# Altium PCB RF-UNIT-SPLIT.PcbDoc (part 2 of 2)
Units mm, origin at the board's own origin, x right, y up, seen from the top; angles counter-clockwise.
Board outline 99.88 x 99.9 mm, 2 copper layers (Top Layer, Bottom Layer), stack 1.671 mm thick; 85 components, 98 nets, 425 pads, 1878 vias.
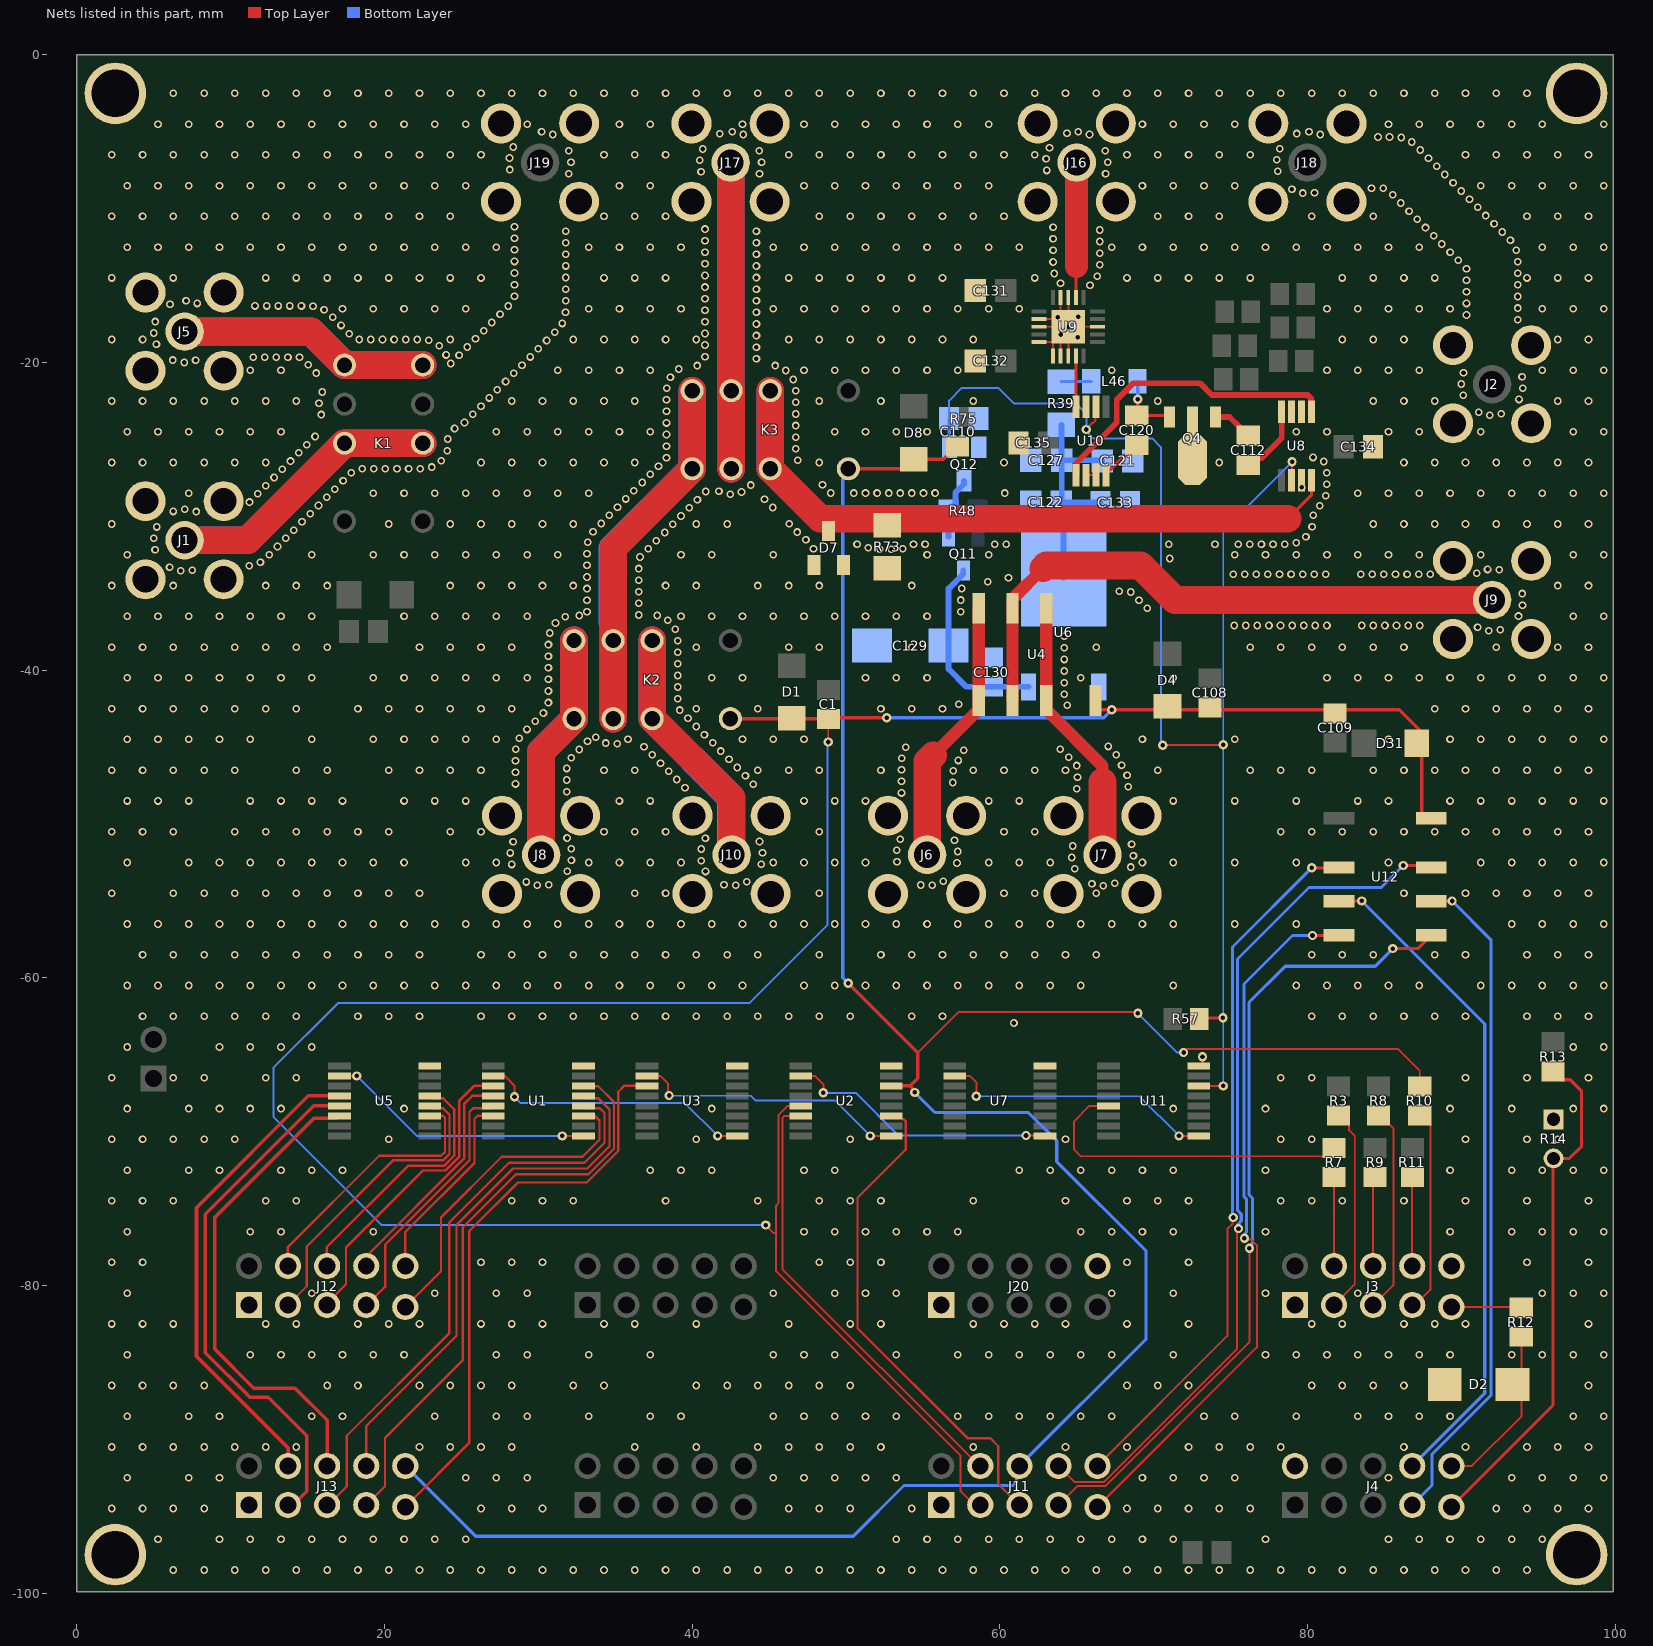
[diagram p2: the nets of this part, all layers, seen from the top]

## Via types
v1: diameter 0.5, hole 0.3, Top Layer to Bottom Layer, tented both sides, 1784 vias
v2: diameter 0.6, hole 0.3, Top Layer to Bottom Layer, tented both sides, 57 vias
v3: diameter 0.6, hole 0.3, Top Layer to Bottom Layer, 37 vias

## Nets (pads, with @x,y where several pads share a name; then routed paths per layer and width w, separated by ;. In a path a pad name is that pad's centre, name@x,y a point inside that pad or via, vN(x,y) a via of type N, cw(c..) or ccw(c..) an arc to the next point about the centre after c; other vN are vias at no path point) (continued)
GND: C121.1 C122.1 C127.1 C129.2 C130.1 C131.1 C132.1 C133.1 C134.1 C135.1 D2.2 D7.1 D7.2 J1.1 J1.2 J1.3 J1.4 J2.1 J2.2 J2.3 J2.4 J3.1 J3.10 J4.2 J5.1 J5.2 J5.3 J5.4 J6.1 J6.2 J6.3 J6.4 J7.1 J7.2 J7.3 J7.4 J8.1 J8.2 J8.3 J8.4 J9.1 J9.2 J9.3 J9.4 J10.1 J10.2 J10.3 J10.4 J11.1 J12.1 J13.1 J16.1 J16.2 J16.3 J16.4 J17.1 J17.2 J17.3 J17.4 J18.1 J18.2 J18.3 J18.4 J19.1 J19.2 J19.3 J19.4 J20.1 J20.10 pad.6 Q4.0 Q4.2 Q12.2 R14.1 R73.1 R75.1 U1.16 U2.16 U3.16 U5.16 U6.1 U7.16 U8.3 U8.6 U8.7 U9.3 U9.4 U9.7 U9.8 U9.10 U9.11 U9.12 U9.13 U9.18 U9.21 U10.3 U10.6 U10.7 U11.16 | length 17.1
  Top Layer w0.127: U9.10@62.55,-18.675 U9.21@63.45,-18.675 ; U9.8@62.55,-17.675 v1(64.45,-17.675) ; U9.7@62.55,-17.175 U9.21@63.95,-17.175 ; U9.11@63.45,-19.575 U9.21@63.45,-18.675 ; U9.12@63.95,-19.575 v1(63.95,-18.175) ; U9.4@63.95,-15.775 U9.21@63.95,-17.175 ; U9.13@64.45,-19.575 v1(64.45,-17.675) ; U9.3@64.45,-15.775 v1(64.45,-17.675) ; U10.6@65.6,-27.325 U10.7@66.25,-27.325 ; U9.18@66.35,-17.675 v1(64.45,-17.675) ; U11.16@72.935,-65.725 73.013,-65.725 73.175,-65.564 v3(73.175,-65.125) ; U9.21@63.45,-18.675 v1(63.95,-18.175) ; v1(63.95,-18.175) v1(64.45,-17.675) ; U9.21@63.95,-17.175 v1(64.45,-17.675)
  other v1: 6.271,-98.5 8.271,-98.5 10.271,-98.5 12.271,-98.5 14.271,-98.5 16.271,-98.5 18.271,-98.5 20.271,-98.5 22.271,-98.5 24.271,-98.5 26.271,-98.5 28.271,-98.5 30.271,-98.5 32.271,-98.5 34.271,-98.5 36.271,-98.5 38.271,-98.5 40.271,-98.5 42.271,-98.5 44.271,-98.5 46.271,-98.5 48.271,-98.5 50.271,-98.5 52.271,-98.5 54.271,-98.5 56.271,-98.5 58.271,-98.5 60.271,-98.5 62.271,-98.5 64.271,-98.5 66.271,-98.5 68.271,-98.5 70.271,-98.5 72.271,-98.5 74.271,-98.5 76.271,-98.5 78.271,-98.5 80.271,-98.5 82.271,-98.5 84.271,-98.5 86.271,-98.5 88.271,-98.5 90.271,-98.5 92.271,-98.5 94.271,-98.5 5.271,-96.5 9.271,-96.5 11.271,-96.5 13.271,-96.5 15.271,-96.5 17.271,-96.5 19.271,-96.5 21.271,-96.5 23.271,-96.5 25.271,-96.5 53.271,-96.5 55.271,-96.5 57.271,-96.5 59.271,-96.5 61.271,-96.5 63.271,-96.5 65.271,-96.5 67.271,-96.5 69.271,-96.5 71.271,-96.5 77.271,-96.5 85.271,-96.5 87.271,-96.5 89.271,-96.5 91.271,-96.5 93.271,-96.5 95.271,-96.5 2.271,-94.5 4.271,-94.5 6.271,-94.5 8.271,-94.5 26.271,-94.5 28.271,-94.5 30.271,-94.5 46.271,-94.5 48.271,-94.5 50.271,-94.5 54.271,-94.5 68.271,-94.5 70.271,-94.5 72.271,-94.5 74.271,-94.5 76.271,-94.5 92.271,-94.5 94.271,-94.5 96.271,-94.5 98.271,-94.5 3.271,-92.5 7.271,-92.5 9.271,-92.5 25.271,-92.5 27.271,-92.5 29.271,-92.5 45.271,-92.5 47.271,-92.5 49.271,-92.5 51.271,-92.5 53.271,-92.5 69.271,-92.5 71.271,-92.5 73.271,-92.5 75.271,-92.5 85.271,-92.5 93.271,-92.5 95.271,-92.5 97.271,-92.5 99.271,-92.5 2.271,-90.5 4.271,-90.5 6.271,-90.5 8.271,-90.5 10.271,-90.5 12.271,-90.5 14.271,-90.5 22.271,-90.5 24.271,-90.5 26.271,-90.5 28.271,-90.5 36.271,-90.5 40.271,-90.5 44.271,-90.5 46.271,-90.5 48.271,-90.5 50.271,-90.5 52.271,-90.5 58.271,-90.5 64.271,-90.5 68.271,-90.5 72.271,-90.5 74.271,-90.5 76.271,-90.5 78.271,-90.5 86.271,-90.5 90.271,-90.5 94.271,-90.5 96.271,-90.5 98.271,-90.5 3.271,-88.5 7.271,-88.5 9.271,-88.5 15.271,-88.5 17.271,-88.5 23.271,-88.5 27.271,-88.5 29.271,-88.5 33.271,-88.5 37.271,-88.5 39.271,-88.5 45.271,-88.5 47.271,-88.5 49.271,-88.5 51.271,-88.5 53.271,-88.5 57.271,-88.5 59.271,-88.5 61.271,-88.5 63.271,-88.5 65.271,-88.5 67.271,-88.5 73.271,-88.5 75.271,-88.5 79.271,-88.5 83.271,-88.5 85.271,-88.5 87.271,-88.5 89.271,-88.5 97.271,-88.5 99.271,-88.5 2.271,-86.5 4.271,-86.5 6.271,-86.5 8.271,-86.5 16.271,-86.5 18.271,-86.5 22.271,-86.5 24.271,-86.5 26.271,-86.5 28.271,-86.5 32.271,-86.5 34.271,-86.5 40.271,-86.5 42.271,-86.5 44.271,-86.5 46.271,-86.5 48.271,-86.5 50.271,-86.5 68.271,-86.5 70.271,-86.5 72.271,-86.5 80.271,-86.5 82.271,-86.5 84.271,-86.5 86.271,-86.5 98.271,-86.5 3.271,-84.5 11.271,-84.5 13.271,-84.5 15.271,-84.5 17.271,-84.5 19.271,-84.5 21.271,-84.5 27.271,-84.5 29.271,-84.5 33.271,-84.5 37.271,-84.5 45.271,-84.5 47.271,-84.5 49.271,-84.5 53.271,-84.5 57.271,-84.5 59.271,-84.5 61.271,-84.5 63.271,-84.5 65.271,-84.5 67.271,-84.5 71.271,-84.5 77.271,-84.5 79.271,-84.5 81.271,-84.5 83.271,-84.5 85.271,-84.5 87.271,-84.5 89.271,-84.5 93.271,-84.5 95.271,-84.5 97.271,-84.5 99.271,-84.5 2.271,-82.5 4.271,-82.5 6.271,-82.5 12.271,-82.5 14.271,-82.5 18.271,-82.5 20.271,-82.5 22.271,-82.5 26.271,-82.5 28.271,-82.5 30.271,-82.5 34.271,-82.5 36.271,-82.5 40.271,-82.5 46.271,-82.5 50.271,-82.5 52.271,-82.5 58.271,-82.5 60.271,-82.5 62.271,-82.5 64.271,-82.5 68.271,-82.5 72.271,-82.5 80.271,-82.5 82.271,-82.5 86.271,-82.5 88.271,-82.5 90.271,-82.5 98.271,-82.5 3.271,-80.5 15.271,-80.5 23.271,-80.5 27.271,-80.5 29.271,-80.5 45.271,-80.5 49.271,-80.5 51.271,-80.5 53.271,-80.5 67.271,-80.5 71.271,-80.5 77.271,-80.5 83.271,-80.5 95.271,-80.5 97.271,-80.5 99.271,-80.5 2.271,-78.5 4.271,-78.5 26.271,-78.5 28.271,-78.5 30.271,-78.5 48.271,-78.5 50.271,-78.5 52.271,-78.5 68.271,-78.5 72.271,-78.5 94.271,-78.5 98.271,-78.5 3.271,-76.5 11.271,-76.5 13.271,-76.5 19.271,-76.5 47.271,-76.5 49.271,-76.5 51.271,-76.5 53.271,-76.5 55.271,-76.5 57.271,-76.5 65.271,-76.5 67.271,-76.5 69.271,-76.5 71.271,-76.5 77.271,-76.5 89.271,-76.5 93.271,-76.5 95.271,-76.5 97.271,-76.5 99.271,-76.5 2.271,-74.5 4.271,-74.5 6.271,-74.5 12.271,-74.5 14.271,-74.5 28.271,-74.5 30.271,-74.5 32.271,-74.5 38.271,-74.5 44.271,-74.5 48.271,-74.5 50.271,-74.5 52.271,-74.5 58.271,-74.5 64.271,-74.5 68.271,-74.5 70.271,-74.5 72.271,-74.5 78.271,-74.5 80.271,-74.5 82.271,-74.5 86.271,-74.5 90.271,-74.5 94.271,-74.5 98.271,-74.5 3.271,-72.5 7.271,-72.5 9.271,-72.5 13.271,-72.5 15.271,-72.5 17.271,-72.5 37.271,-72.5 39.271,-72.5 41.271,-72.5 47.271,-72.5 49.271,-72.5 61.271,-72.5 63.271,-72.5 65.271,-72.5 67.271,-72.5 69.271,-72.5 71.271,-72.5 77.271,-72.5 89.271,-72.5 93.271,-72.5 95.271,-72.5 97.271,-72.5 99.271,-72.5 2.271,-70.5 4.271,-70.5 6.271,-70.5 8.271,-70.5 10.271,-70.5 20.271,-70.5 40.271,-70.5 50.271,-70.5 64.271,-70.5 78.271,-70.5 80.271,-70.5 90.271,-70.5 94.271,-70.5 96.271,-70.5 3.271,-68.5 7.271,-68.5 9.271,-68.5 11.271,-68.5 13.271,-68.5 21.271,-68.5 41.271,-68.5 71.271,-68.5 77.271,-68.5 89.271,-68.5 93.271,-68.5 97.271,-68.5 99.271,-68.5 2.271,-66.5 6.271,-66.5 8.271,-66.5 12.271,-66.5 14.271,-66.5 78.271,-66.5 80.271,-66.5 90.271,-66.5 94.271,-66.5 98.271,-66.5 3.271,-64.5 9.271,-64.5 11.271,-64.5 13.271,-64.5 15.271,-64.5 97.271,-64.5 99.271,-64.5 60.917,-62.934 4.271,-62.5 6.271,-62.5 8.271,-62.5 10.271,-62.5 12.271,-62.5 14.271,-62.5 18.271,-62.5 20.271,-62.5 22.271,-62.5 26.271,-62.5 28.271,-62.5 30.271,-62.5 32.271,-62.5 34.271,-62.5 36.271,-62.5 38.271,-62.5 40.271,-62.5 42.271,-62.5 44.271,-62.5 46.271,-62.5 48.271,-62.5 50.271,-62.5 54.271,-62.5 56.271,-62.5 80.271,-62.5 82.271,-62.5 84.271,-62.5 86.271,-62.5 88.271,-62.5 90.271,-62.5 94.271,-62.5 96.271,-62.5 98.271,-62.5 3.271,-60.5 5.271,-60.5 7.271,-60.5 9.271,-60.5 11.271,-60.5 13.271,-60.5 15.271,-60.5 17.271,-60.5 19.271,-60.5 21.271,-60.5 23.271,-60.5 25.271,-60.5 27.271,-60.5 29.271,-60.5 31.271,-60.5 33.271,-60.5 35.271,-60.5 37.271,-60.5 39.271,-60.5 41.271,-60.5 43.271,-60.5 47.271,-60.5 49.271,-60.5 51.271,-60.5 53.271,-60.5 55.271,-60.5 57.271,-60.5 59.271,-60.5 61.271,-60.5 63.271,-60.5 65.271,-60.5 71.271,-60.5 79.271,-60.5 81.271,-60.5 83.271,-60.5 85.271,-60.5 87.271,-60.5 91.271,-60.5 93.271,-60.5 95.271,-60.5 97.271,-60.5 99.271,-60.5 4.271,-58.5 6.271,-58.5 8.271,-58.5 10.271,-58.5 12.271,-58.5 14.271,-58.5 16.271,-58.5 18.271,-58.5 20.271,-58.5 22.271,-58.5 26.271,-58.5 28.271,-58.5 30.271,-58.5 32.271,-58.5 34.271,-58.5 36.271,-58.5 38.271,-58.5 40.271,-58.5 42.271,-58.5 44.271,-58.5 48.271,-58.5 52.271,-58.5 54.271,-58.5 56.271,-58.5 58.271,-58.5 60.271,-58.5 62.271,-58.5 64.271,-58.5 66.271,-58.5 80.271,-58.5 82.271,-58.5 84.271,-58.5 88.271,-58.5 90.271,-58.5 94.271,-58.5 96.271,-58.5 98.271,-58.5 3.271,-56.5 5.271,-56.5 7.271,-56.5 9.271,-56.5 11.271,-56.5 13.271,-56.5 15.271,-56.5 17.271,-56.5 19.271,-56.5 21.271,-56.5 23.271,-56.5 25.271,-56.5 27.271,-56.5 29.271,-56.5 31.271,-56.5 33.271,-56.5 35.271,-56.5 37.271,-56.5 39.271,-56.5 41.271,-56.5 43.271,-56.5 45.271,-56.5 47.271,-56.5 49.271,-56.5 51.271,-56.5 53.271,-56.5 55.271,-56.5 57.271,-56.5 59.271,-56.5 61.271,-56.5 63.271,-56.5 65.271,-56.5 67.271,-56.5 69.271,-56.5 71.271,-56.5 75.271,-56.5 79.271,-56.5 93.271,-56.5 95.271,-56.5 97.271,-56.5 99.271,-56.5 2.271,-54.5 6.271,-54.5 8.271,-54.5 10.271,-54.5 12.271,-54.5 14.271,-54.5 16.271,-54.5 18.271,-54.5 20.271,-54.5 22.271,-54.5 36.271,-54.5 38.271,-54.5 48.271,-54.5 60.271,-54.5 62.271,-54.5 66.271,-54.5 86.271,-54.5 90.271,-54.5 92.271,-54.5 94.271,-54.5 96.271,-54.5 98.271,-54.5 29.932,-53.992 42.824,-53.99 66.731,-54.011 54.857,-53.969 55.611,-53.98 30.684,-53.945 42.071,-53.949 65.987,-53.887 67.467,-53.844 29.212,-53.766 43.541,-53.758 56.319,-53.719 40.868,-53.082 31.88,-53.068 64.878,-52.906 68.515,-52.8 28.263,-52.627 44.483,-52.612 57.213,-52.536 3.271,-52.5 7.271,-52.5 9.271,-52.5 11.271,-52.5 13.271,-52.5 15.271,-52.5 17.271,-52.5 19.271,-52.5 21.271,-52.5 25.271,-52.5 27.271,-52.5 33.271,-52.5 35.271,-52.5 37.271,-52.5 39.271,-52.5 45.271,-52.5 47.271,-52.5 49.271,-52.5 51.271,-52.5 59.271,-52.5 61.271,-52.5 63.271,-52.5 69.271,-52.5 71.271,-52.5 75.271,-52.5 79.271,-52.5 85.271,-52.5 91.271,-52.5 93.271,-52.5 95.271,-52.5 97.271,-52.5 99.271,-52.5 53.316,-52.459 32.151,-52.364 40.591,-52.381 64.675,-52.18 68.686,-52.066 28.167,-51.879 44.571,-51.864 57.27,-51.785 53.29,-51.705 32.147,-51.61 40.59,-51.627 64.746,-51.429 68.566,-51.321 28.356,-51.149 44.378,-51.135 57.055,-51.062 53.535,-50.992 40.861,-50.923 31.868,-50.91 2.271,-50.5 4.271,-50.5 6.271,-50.5 10.271,-50.5 12.271,-50.5 14.271,-50.5 16.271,-50.5 18.271,-50.5 20.271,-50.5 24.271,-50.5 26.271,-50.5 34.271,-50.5 36.271,-50.5 38.271,-50.5 48.271,-50.5 60.271,-50.5 62.271,-50.5 78.271,-50.5 80.271,-50.5 82.271,-50.5 84.271,-50.5 86.271,-50.5 88.271,-50.5 90.271,-50.5 92.271,-50.5 94.271,-50.5 96.271,-50.5 98.271,-50.5 3.271,-48.5 5.271,-48.5 7.271,-48.5 11.271,-48.5 13.271,-48.5 15.271,-48.5 17.271,-48.5 21.271,-48.5 23.271,-48.5 25.271,-48.5 35.271,-48.5 37.271,-48.5 47.271,-48.5 49.271,-48.5 51.271,-48.5 59.271,-48.5 61.271,-48.5 71.271,-48.5 75.271,-48.5 79.271,-48.5 83.271,-48.5 85.271,-48.5 89.271,-48.5 91.271,-48.5 93.271,-48.5 95.271,-48.5 97.271,-48.5 99.271,-48.5 53.611,-47.98 31.839,-47.895 65.011,-47.707 39.537,-47.64 68.339,-47.586 43.963,-47.422 28.511,-47.396 56.939,-47.301 53.611,-47.226 31.839,-47.141 39.003,-47.107 65.046,-46.954 43.462,-46.859 68.273,-46.835 28.511,-46.642 38.47,-46.574 56.978,-46.548 2.271,-46.5 4.271,-46.5 6.271,-46.5 8.271,-46.5 10.271,-46.5 14.271,-46.5 16.271,-46.5 20.271,-46.5 22.271,-46.5 24.271,-46.5 26.271,-46.5 34.271,-46.5 36.271,-46.5 44.271,-46.5 46.271,-46.5 48.271,-46.5 52.271,-46.5 58.271,-46.5 60.271,-46.5 62.271,-46.5 64.271,-46.5 70.271,-46.5 76.271,-46.5 78.271,-46.5 80.271,-46.5 84.271,-46.5 86.271,-46.5 88.271,-46.5 90.271,-46.5 92.271,-46.5 94.271,-46.5 96.271,-46.5 98.271,-46.5 53.611,-46.472 31.839,-46.387 42.929,-46.325 65.005,-46.201 67.916,-46.171 37.937,-46.041 28.511,-45.888 57.3,-45.866 42.396,-45.792 53.631,-45.718 32.132,-45.692 64.471,-45.668 37.404,-45.507 67.576,-45.498 41.863,-45.259 57.649,-45.198 32.665,-45.159 28.525,-45.134 63.938,-45.135 53.889,-45.01 36.871,-44.974 67.052,-44.956 35.134,-44.785 34.381,-44.738 41.329,-44.726 33.198,-44.626 3.271,-44.5 5.271,-44.5 7.271,-44.5 9.271,-44.5 11.271,-44.5 15.271,-44.5 19.271,-44.5 21.271,-44.5 23.271,-44.5 25.271,-44.5 27.271,-44.5 35.83,-44.494 43.271,-44.5 45.271,-44.5 47.271,-44.5 69.271,-44.5 75.271,-44.5 85.271,-44.5 89.271,-44.5 91.271,-44.5 93.271,-44.5 95.271,-44.5 97.271,-44.5 99.271,-44.5 28.766,-44.419 33.728,-44.362 40.796,-44.193 29.264,-43.853 40.263,-43.66 29.797,-43.319 39.73,-43.126 30.33,-42.786 39.197,-42.593 2.271,-42.5 4.271,-42.5 6.271,-42.5 8.271,-42.5 10.271,-42.5 12.271,-42.5 14.271,-42.5 18.271,-42.5 20.271,-42.5 22.271,-42.5 24.271,-42.5 26.271,-42.5 28.271,-42.5 40.271,-42.5 44.271,-42.5 52.271,-42.5 54.271,-42.5 56.271,-42.5 88.271,-42.5 90.271,-42.5 92.271,-42.5 94.271,-42.5 96.271,-42.5 98.271,-42.5 64.387,-42.29 57.335,-42.218 30.656,-42.106 39.064,-41.851 64.189,-41.562 30.656,-41.352 39.064,-41.097 64.189,-40.808 30.656,-40.598 3.271,-40.5 5.271,-40.5 7.271,-40.5 9.271,-40.5 11.271,-40.5 13.271,-40.5 15.271,-40.5 19.271,-40.5 21.271,-40.5 23.271,-40.5 25.271,-40.5 27.271,-40.5 29.271,-40.5 41.271,-40.5 43.271,-40.5 51.271,-40.5 53.271,-40.5 55.271,-40.5 65.271,-40.5 71.271,-40.5 81.271,-40.5 83.271,-40.5 85.271,-40.5 87.271,-40.5 89.271,-40.5 91.271,-40.5 93.271,-40.5 95.271,-40.5 97.271,-40.5 99.271,-40.5 39.064,-40.343 64.189,-40.054 30.656,-39.844 39.064,-39.589 64.189,-39.3 30.656,-39.09 39.064,-38.835 64.189,-38.546 2.271,-38.5 4.271,-38.5 6.271,-38.5 8.271,-38.5 10.271,-38.5 12.271,-38.5 14.271,-38.5 16.271,-38.5 22.271,-38.5 24.271,-38.5 26.271,-38.5 28.271,-38.5 40.271,-38.5 46.271,-38.5 48.271,-38.5 54.271,-38.5 66.271,-38.5 76.271,-38.5 78.271,-38.5 80.271,-38.5 82.271,-38.5 84.271,-38.5 86.271,-38.5 92.271,-38.5 96.271,-38.5 98.271,-38.5 30.656,-38.336 39.064,-38.081 64.189,-37.792 30.733,-37.586 91.781,-37.43 92.533,-37.374 38.893,-37.347 91.059,-37.213 75.233,-37.099 75.987,-37.099 76.741,-37.099 77.495,-37.099 78.249,-37.099 79.003,-37.099 79.757,-37.099 80.511,-37.099 81.265,-37.099 83.527,-37.099 84.281,-37.099 85.035,-37.099 85.789,-37.099 86.543,-37.099 87.297,-37.099 31.112,-36.934 38.417,-36.762 31.74,-36.517 3.271,-36.5 5.271,-36.5 7.271,-36.5 9.271,-36.5 11.271,-36.5 13.271,-36.5 15.271,-36.5 21.271,-36.5 23.271,-36.5 25.271,-36.5 27.271,-36.5 29.271,-36.5 39.271,-36.5 41.271,-36.5 43.271,-36.5 45.271,-36.5 47.271,-36.5 49.271,-36.5 51.271,-36.5 53.271,-36.5 55.271,-36.5 97.271,-36.5 99.271,-36.5 93.717,-36.482 32.654,-36.443 37.734,-36.443 36.524,-36.411 33.161,-36.204 57.461,-36.197 69.578,-35.981 93.979,-35.775 36.524,-35.657 33.161,-35.45 69.045,-35.448 57.469,-35.443 93.969,-35.021 68.511,-34.915 36.524,-34.903 67.759,-34.864 33.161,-34.696 57.531,-34.691 2.271,-34.5 6.271,-34.5 12.271,-34.5 14.271,-34.5 16.271,-34.5 24.271,-34.5 26.271,-34.5 28.271,-34.5 30.271,-34.5 32.271,-34.5 38.271,-34.5 40.271,-34.5 44.271,-34.5 46.271,-34.5 48.271,-34.5 54.271,-34.5 96.271,-34.5 98.271,-34.5 59.221,-34.244 36.524,-34.149 60.566,-33.987 33.161,-33.942 75.165,-33.771 75.919,-33.771 76.673,-33.771 77.427,-33.771 78.181,-33.771 78.935,-33.771 79.689,-33.771 80.443,-33.771 81.197,-33.771 83.459,-33.771 84.213,-33.771 84.967,-33.771 85.721,-33.771 86.475,-33.771 87.229,-33.771 87.983,-33.771 90.995,-33.693 6.744,-33.54 7.497,-33.499 92.462,-33.477 91.709,-33.45 36.524,-33.395 6.026,-33.31 11.211,-33.205 33.161,-33.188 11.931,-32.982 71.047,-32.743 36.608,-32.646 3.271,-32.5 12.505,-32.493 15.271,-32.5 19.271,-32.5 21.271,-32.5 23.271,-32.5 25.271,-32.5 27.271,-32.5 29.271,-32.5 31.271,-32.5 39.271,-32.5 41.271,-32.5 45.271,-32.5 55.271,-32.5 59.271,-32.5 75.271,-32.5 77.271,-32.5 79.271,-32.5 81.271,-32.5 83.271,-32.5 85.271,-32.5 87.271,-32.5 91.271,-32.5 97.271,-32.5 99.271,-32.5 33.161,-32.434 5.083,-32.165 52.188,-32.131 52.942,-32.131 37.141,-32.113 47.888,-32.099 53.695,-32.116 51.438,-32.047 13.039,-31.96 50.721,-31.814 54.386,-31.814 55.14,-31.814 59.664,-31.814 60.418,-31.814 70.974,-31.814 73.99,-31.814 75.498,-31.814 76.252,-31.814 77.006,-31.814 77.76,-31.814 78.514,-31.814 79.263,-31.72 33.214,-31.682 37.674,-31.58 47.395,-31.528 4.994,-31.416 13.572,-31.427 79.901,-31.319 38.207,-31.046 33.555,-31.009 46.838,-31.021 14.105,-30.894 5.186,-30.687 80.299,-30.678 2.271,-30.5 20.271,-30.5 24.271,-30.5 26.271,-30.5 28.271,-30.5 30.271,-30.5 32.271,-30.5 38.74,-30.513 40.271,-30.5 42.271,-30.5 84.271,-30.5 86.271,-30.5 88.271,-30.5 90.271,-30.5 92.271,-30.5 94.271,-30.5 96.271,-30.5 98.271,-30.5 46.304,-30.488 34.079,-30.467 14.638,-30.361 39.274,-29.98 34.612,-29.934 80.366,-29.928 15.171,-29.827 7.75,-29.689 6.27,-29.681 7.011,-29.539 39.807,-29.447 45.238,-29.422 35.145,-29.401 80.792,-29.305 15.704,-29.294 11.219,-29.073 40.34,-28.914 44.705,-28.889 35.678,-28.868 16.238,-28.761 81.191,-28.666 11.752,-28.539 42.465,-28.563 7.271,-28.5 19.271,-28.5 21.271,-28.5 23.271,-28.5 25.271,-28.5 27.271,-28.5 29.271,-28.5 31.271,-28.5 33.271,-28.5 83.271,-28.5 85.271,-28.5 87.271,-28.5 89.271,-28.5 91.271,-28.5 93.271,-28.5 95.271,-28.5 97.271,-28.5 99.271,-28.5 49.004,-28.481 50.512,-28.486 51.266,-28.486 52.02,-28.486 52.774,-28.486 53.528,-28.486 54.282,-28.486 55.036,-28.486 55.79,-28.486 60.314,-28.486 43.206,-28.42 40.873,-28.381 41.739,-28.36 36.212,-28.335 16.771,-28.228 79.634,-28.119 12.285,-28.006 43.808,-27.967 48.471,-27.948 81.256,-27.914 36.745,-27.802 17.304,-27.695 12.818,-27.473 37.278,-27.269 17.837,-27.162 81.256,-27.16 13.351,-26.94 18.548,-26.909 19.302,-26.909 20.056,-26.909 20.81,-26.909 21.564,-26.909 22.318,-26.909 23.063,-26.796 37.811,-26.735 2.271,-26.5 4.271,-26.5 6.271,-26.5 8.271,-26.5 10.271,-26.5 12.271,-26.5 26.271,-26.5 28.271,-26.5 30.271,-26.5 32.271,-26.5 34.271,-26.5 36.271,-26.5 48.271,-26.5 60.271,-26.5 74.271,-26.5 86.271,-26.5 88.271,-26.5 90.271,-26.5 92.271,-26.5 94.271,-26.5 96.271,-26.5 98.271,-26.5 81.066,-26.431 13.885,-26.407 23.691,-26.379 46.872,-26.348 38.331,-26.189 80.359,-26.169 14.418,-25.874 24.067,-25.726 46.739,-25.606 38.331,-25.435 14.951,-25.34 24.115,-24.973 46.739,-24.852 15.484,-24.807 38.331,-24.681 3.271,-24.5 5.271,-24.5 7.271,-24.5 9.271,-24.5 11.271,-24.5 13.271,-24.5 27.271,-24.5 29.271,-24.5 31.271,-24.5 33.271,-24.5 35.271,-24.5 37.271,-24.5 49.271,-24.5 51.271,-24.5 53.271,-24.5 55.271,-24.5 79.271,-24.5 81.271,-24.5 85.271,-24.5 87.271,-24.5 91.271,-24.5 97.271,-24.5 99.271,-24.5 24.553,-24.285 46.739,-24.098 38.331,-23.927 25.2,-23.898 91.856,-23.42 15.888,-23.383 25.736,-23.368 46.739,-23.344 92.605,-23.335 91.127,-23.225 38.331,-23.173 26.269,-22.835 15.742,-22.643 46.739,-22.59 2.271,-22.5 4.271,-22.5 6.271,-22.5 8.271,-22.5 10.271,-22.5 12.271,-22.5 14.271,-22.5 28.271,-22.5 30.271,-22.5 32.271,-22.5 34.271,-22.5 36.271,-22.5 48.271,-22.5 52.271,-22.5 58.271,-22.5 70.271,-22.5 84.271,-22.5 86.271,-22.5 88.271,-22.5 96.271,-22.5 98.271,-22.5 38.331,-22.419 93.754,-22.398 26.802,-22.301 90.127,-22.135 15.941,-21.916 46.739,-21.836 27.335,-21.768 93.989,-21.681 38.345,-21.665 89.989,-21.394 27.868,-21.235 46.568,-21.102 38.586,-20.951 93.951,-20.928 28.402,-20.702 15.567,-20.686 90.143,-20.656 46.092,-20.517 11.271,-20.5 13.271,-20.5 31.271,-20.5 33.271,-20.5 35.271,-20.5 37.271,-20.5 47.271,-20.5 49.271,-20.5 51.271,-20.5 53.271,-20.5 55.271,-20.5 57.271,-20.5 67.271,-20.5 81.271,-20.5 83.271,-20.5 85.271,-20.5 87.271,-20.5 95.271,-20.5 97.271,-20.5 99.271,-20.5 39.118,-20.417 40.329,-20.198 45.409,-20.198 28.935,-20.169 15.034,-20.153 24.312,-20.06 6.975,-19.996 7.717,-19.86 6.237,-19.841 44.177,-19.756 11.457,-19.649 12.211,-19.649 12.965,-19.649 13.719,-19.649 14.473,-19.649 29.468,-19.636 40.836,-19.618 24.845,-19.526 24,-19.506 30.001,-19.102 25.378,-18.993 44.177,-19.002 23.552,-18.9 40.836,-18.864 5.172,-18.814 22.881,-18.556 30.534,-18.569 2.271,-18.5 4.271,-18.5 18.359,-18.501 19.113,-18.501 19.867,-18.501 20.621,-18.501 21.375,-18.501 22.129,-18.501 24.271,-18.5 32.271,-18.5 34.271,-18.5 36.271,-18.5 38.271,-18.5 40.271,-18.5 46.271,-18.5 48.271,-18.5 50.271,-18.5 52.271,-18.5 54.271,-18.5 56.271,-18.5 58.271,-18.5 82.271,-18.5 84.271,-18.5 86.271,-18.5 96.271,-18.5 98.271,-18.5 25.911,-18.46 65.075,-18.35 44.177,-18.248 17.708,-18.12 40.836,-18.11 4.989,-18.083 31.067,-18.036 26.444,-17.927 17.175,-17.586 44.177,-17.494 31.552,-17.458 26.978,-17.394 40.836,-17.356 5.097,-17.337 93.664,-17.215 16.642,-17.053 63.775,-17.05 65.1,-17.025 90.336,-16.911 27.511,-16.861 31.768,-16.736 44.177,-16.74 40.836,-16.602 16.07,-16.562 17.271,-16.5 19.271,-16.5 21.271,-16.5 23.271,-16.5 25.271,-16.5 33.271,-16.5 35.271,-16.5 37.271,-16.5 39.271,-16.5 45.271,-16.5 47.271,-16.5 49.271,-16.5 51.271,-16.5 53.271,-16.5 55.271,-16.5 57.271,-16.5 59.271,-16.5 61.271,-16.5 81.271,-16.5 83.271,-16.5 85.271,-16.5 87.271,-16.5 89.271,-16.5 95.271,-16.5 97.271,-16.5 99.271,-16.5 93.664,-16.461 15.352,-16.332 28.044,-16.328 11.582,-16.321 12.336,-16.321 13.09,-16.321 13.844,-16.321 14.598,-16.321 6.057,-16.208 7.83,-16.157 90.336,-16.157 7.099,-15.974 31.774,-15.982 44.177,-15.986 40.836,-15.848 28.446,-15.69 93.664,-15.707 90.336,-15.403 44.177,-15.232 31.774,-15.228 40.836,-15.094 65.865,-14.966 93.664,-14.953 28.446,-14.936 63.945,-14.85 90.336,-14.649 2.271,-14.5 6.271,-14.5 12.271,-14.5 14.271,-14.5 16.271,-14.5 18.271,-14.5 20.271,-14.5 22.271,-14.5 24.271,-14.5 26.271,-14.5 34.271,-14.5 36.271,-14.5 38.271,-14.5 46.271,-14.5 48.271,-14.5 50.271,-14.5 52.271,-14.5 54.271,-14.5 56.271,-14.5 62.271,-14.5 68.271,-14.5 70.271,-14.5 72.271,-14.5 74.271,-14.5 76.271,-14.5 82.271,-14.5 84.271,-14.5 86.271,-14.5 88.271,-14.5 94.271,-14.5 96.271,-14.5 98.271,-14.5 31.774,-14.474 44.177,-14.478 66.343,-14.383 40.836,-14.34 63.54,-14.214 93.664,-14.199 28.446,-14.182 90.336,-13.895 31.774,-13.72 44.177,-13.724 66.488,-13.643 40.836,-13.586 63.462,-13.464 28.446,-13.428 93.664,-13.445 89.805,-13.359 44.177,-12.97 31.774,-12.966 66.488,-12.889 40.836,-12.832 89.272,-12.826 63.462,-12.71 93.581,-12.695 28.446,-12.674 3.271,-12.5 5.271,-12.5 7.271,-12.5 9.271,-12.5 11.271,-12.5 13.271,-12.5 15.271,-12.5 17.271,-12.5 19.271,-12.5 21.271,-12.5 23.271,-12.5 25.271,-12.5 27.271,-12.5 33.271,-12.5 35.271,-12.5 37.271,-12.5 39.271,-12.5 45.271,-12.5 47.271,-12.5 49.271,-12.5 51.271,-12.5 53.271,-12.5 55.271,-12.5 57.271,-12.5 59.271,-12.5 61.271,-12.5 67.271,-12.5 69.271,-12.5 71.271,-12.5 73.271,-12.5 75.271,-12.5 77.271,-12.5 79.271,-12.5 81.271,-12.5 83.271,-12.5 85.271,-12.5 87.271,-12.5 95.271,-12.5 97.271,-12.5 99.271,-12.5 88.739,-12.293 31.774,-12.212 44.177,-12.216 66.488,-12.135 40.836,-12.078 93.195,-12.047 63.462,-11.956 28.446,-11.92 88.206,-11.76 92.665,-11.511 31.774,-11.458 44.177,-11.462 66.488,-11.381 40.836,-11.324 87.673,-11.226 63.462,-11.202 28.446,-11.166 92.132,-10.978 87.14,-10.693 2.271,-10.5 4.271,-10.5 6.271,-10.5 8.271,-10.5 10.271,-10.5 12.271,-10.5 14.271,-10.5 16.271,-10.5 18.271,-10.5 20.271,-10.5 22.271,-10.5 24.271,-10.5 34.271,-10.5 36.271,-10.5 38.271,-10.5 48.271,-10.5 50.271,-10.5 52.271,-10.5 54.271,-10.5 56.271,-10.5 58.271,-10.5 60.271,-10.5 70.271,-10.5 72.271,-10.5 74.271,-10.5 80.271,-10.5 84.271,-10.5 94.271,-10.5 96.271,-10.5 98.271,-10.5 91.599,-10.445 86.606,-10.16 91.066,-9.912 86.073,-9.627 90.532,-9.379 85.54,-9.094 79.703,-8.985 80.457,-8.959 89.999,-8.846 78.99,-8.739 84.166,-8.664 84.92,-8.664 3.271,-8.5 5.271,-8.5 7.271,-8.5 9.271,-8.5 11.271,-8.5 13.271,-8.5 15.271,-8.5 17.271,-8.5 19.271,-8.5 21.271,-8.5 23.271,-8.5 25.271,-8.5 35.271,-8.5 37.271,-8.5 47.271,-8.5 49.271,-8.5 51.271,-8.5 53.271,-8.5 55.271,-8.5 57.271,-8.5 59.271,-8.5 69.271,-8.5 71.271,-8.5 73.271,-8.5 75.271,-8.5 91.271,-8.5 93.271,-8.5 95.271,-8.5 97.271,-8.5 99.271,-8.5 89.466,-8.313 88.933,-7.779 31.984,-7.718 44.374,-7.718 66.874,-7.718 40.579,-7.599 78.072,-7.574 63.055,-7.512 28.15,-7.456 88.4,-7.246 32.121,-6.976 44.511,-6.976 67.011,-6.976 40.496,-6.849 77.999,-6.824 63.008,-6.759 28.125,-6.702 87.867,-6.713 2.271,-6.5 4.271,-6.5 6.271,-6.5 8.271,-6.5 10.271,-6.5 12.271,-6.5 14.271,-6.5 16.271,-6.5 18.271,-6.5 20.271,-6.5 22.271,-6.5 24.271,-6.5 26.271,-6.5 34.271,-6.5 36.271,-6.5 38.271,-6.5 46.271,-6.5 48.271,-6.5 50.271,-6.5 52.271,-6.5 54.271,-6.5 56.271,-6.5 58.271,-6.5 60.271,-6.5 62.271,-6.5 68.271,-6.5 70.271,-6.5 72.271,-6.5 74.271,-6.5 76.271,-6.5 90.271,-6.5 92.271,-6.5 94.271,-6.5 96.271,-6.5 98.271,-6.5 31.966,-6.238 44.356,-6.238 66.856,-6.238 87.333,-6.18 40.692,-6.121 78.202,-6.098 63.233,-6.04 28.372,-5.99 86.782,-5.666 86.09,-5.367 84.582,-5.336 85.336,-5.336 30.94,-5.172 43.33,-5.172 65.83,-5.172 80.83,-5.172 41.785,-5.124 79.309,-5.114 64.37,-5.089 30.209,-4.989 42.599,-4.989 65.099,-4.989 80.099,-4.989 5.271,-4.5 7.271,-4.5 9.271,-4.5 11.271,-4.5 13.271,-4.5 15.271,-4.5 17.271,-4.5 19.271,-4.5 21.271,-4.5 23.271,-4.5 25.271,-4.5 29.271,-4.5 35.271,-4.5 37.271,-4.5 43.271,-4.5 47.271,-4.5 49.271,-4.5 51.271,-4.5 53.271,-4.5 55.271,-4.5 57.271,-4.5 59.271,-4.5 69.271,-4.5 71.271,-4.5 73.271,-4.5 75.271,-4.5 85.271,-4.5 87.271,-4.5 89.271,-4.5 91.271,-4.5 93.271,-4.5 95.271,-4.5 99.271,-4.5 6.271,-2.5 8.271,-2.5 10.271,-2.5 12.271,-2.5 14.271,-2.5 16.271,-2.5 18.271,-2.5 20.271,-2.5 22.271,-2.5 24.271,-2.5 26.271,-2.5 28.271,-2.5 30.271,-2.5 32.271,-2.5 34.271,-2.5 36.271,-2.5 38.271,-2.5 40.271,-2.5 42.271,-2.5 44.271,-2.5 46.271,-2.5 48.271,-2.5 50.271,-2.5 52.271,-2.5 54.271,-2.5 56.271,-2.5 58.271,-2.5 60.271,-2.5 62.271,-2.5 64.271,-2.5 66.271,-2.5 68.271,-2.5 70.271,-2.5 72.271,-2.5 74.271,-2.5 76.271,-2.5 78.271,-2.5 80.271,-2.5 82.271,-2.5 84.271,-2.5 86.271,-2.5 88.271,-2.5 90.271,-2.5 92.271,-2.5 94.271,-2.5
HF-VHF-SELECT: C1.1 C108.1 C109.1 D1.2 D4.2 D31.2 J11.3 K2.12 U2.5 U4.8 U12.8 | length 178.4
  Top Layer w0.127: v3(44.778,-76.074) 45.28,-76.576 45.454,-76.576 ; U2.5@47.065,-68.325 46.204,-68.325 45.604,-68.925 45.604,-74.656 45.454,-74.806 45.454,-76.576 ; v3(48.845,-44.672) 48.845,-43.155 C1.1@48.85,-43.15 ; J11.3@58.73,-94.27 58.345,-94.27 57.45,-93.375 57.45,-91.075 45.454,-79.079 45.454,-76.576
  Top Layer w0.23: K2.12@42.48,-43.15 48.85,-43.15 48.9,-43.1 v2(52.65,-43.1) ; U4.8@66.225,-41.975 66.225,-42.238 66.562,-42.575 v2(67.275,-42.575) 85.975,-42.575 87.44,-44.04 87.44,-49.34 87.725,-49.625 U12.8@88.05,-49.625
  Bottom Layer w0.127: v3(44.778,-76.074) 19.824,-76.074 12.775,-69.025 12.775,-65.85 16.975,-61.65 43.7,-61.65 48.8,-56.55 48.8,-44.717 v3(48.845,-44.672)
  Bottom Layer w0.23: v2(52.65,-43.1) 66.75,-43.1 v2(67.275,-42.575)
HF_AMP_BIAS_ON: J11.5 U2.11 | length 32.6
  Top Layer w0.15: U2.11@52.935,-68.975 53.45,-68.975 53.673,-69.198 53.759,-69.198 53.877,-69.316 53.877,-70.584 53.875,-70.586 53.875,-71.175 50.75,-74.3 50.75,-82.775 57.9,-89.925 59.375,-89.925 59.9,-90.45 59.9,-92.9 J11.5@61.27,-94.27
HF_SWR_DET_BACKW: J11.10 U12.2 | length 46.5
  Top Layer w0.127: J11.10@66.35,-91.73 74.8,-83.28 74.8,-76.325 75.135,-75.99 75.135,-75.619 v3(75.17,-75.584)
  Top Layer w0.2: v3(80.275,-52.85) 82.025,-52.85 U12.2@82.05,-52.825
  Bottom Layer w0.2: v3(75.17,-75.584) 75.123,-75.538 75.123,-58.002 v3(80.275,-52.85)
HF_SWR_DET_FORW: J11.8 U12.7 | length 56.4
  Top Layer w0.127: J11.8@63.81,-91.73 64.851,-92.771 66.781,-92.771 75.41,-84.142 75.41,-76.722 75.426,-76.705 75.426,-76.393 v3(75.517,-76.302)
  Top Layer w0.2: v3(86.225,-52.7) 87.925,-52.7 U12.7@88.05,-52.825
  Bottom Layer w0.2: v3(75.517,-76.302) 75.45,-76.236 75.45,-76.049 75.697,-75.803 75.697,-75.366 75.45,-75.119 75.45,-58.775 80.1,-54.125 84.8,-54.125 v3(86.225,-52.7)
LNA_ON: Q12.1 R57.1 R75.2 U8.2 U10.2 U11.14 | length 91.4
  Top Layer w0.127: v3(65.625,-24.35) 65.625,-24.325 66.025,-23.925 66.067,-23.925 66.2,-23.792 66.2,-23.75 66.234,-23.716 66.234,-22.891 U10.2@66.25,-22.875 ; v3(70.594,-44.886) 70.612,-44.868 74.507,-44.868 v3(74.525,-44.85) ; U11.14@72.935,-67.025 v2(74.525,-67.025) ; U8.2@78.975,-27.65 79,-27.625 v2(79,-26.45)
  Top Layer w0.2: R57.1@72.95,-62.675 73.025,-62.6 v3(74.5,-62.6)
  Bottom Layer w0.127: R75.2@56.7,-23.65 56.7,-22.475 57.525,-21.65 59.9,-21.65 60.925,-22.675 64.975,-22.675 65.625,-23.325 65.625,-24.478 66.099,-24.952 69.927,-24.952 70.475,-25.5 70.475,-44.767 v3(70.594,-44.886) ; v2(74.525,-67.025) v3(74.525,-44.85) 74.525,-30.925 v2(79,-26.45)
  Bottom Layer w0.23: R75.2@56.7,-23.65 56.725,-23.675 Q12.1@56.725,-25.5
MB_ALC: D2.1 J4.10 R12.2 | length 11.1
  Top Layer w0.127: J4.10@89.35,-91.73 90.695,-91.73 93.9,-88.525 R12.2@93.9,-83.325
MB_THERM: J4.9 R13.1 R14.2 | length 33.5
  Top Layer w0.2: J4.9@89.35,-94.397 95.975,-87.772 95.975,-71.765 R14.2@96,-71.74 97.035,-71.74 97.825,-70.95 97.825,-67.375 97.075,-66.625 96.525,-66.625 R13.1@95.975,-66.075
NetC112_1: C112.1 Q4.1 | length 2.7
  Top Layer w0.381: Q4.1@74.025,-23.537 74.937,-23.537 75.59,-24.191 75.59,-24.291 76.05,-24.75 C112.1@76.15,-24.75
NetC112_2: C112.2 U8.8 | length 4.6
  Top Layer w0.381: C112.2@76.15,-26.65 76.598,-26.202 77.027,-26.202 78.325,-24.904 U8.8@78.325,-23.2
NetC120_1: C120.1 U10.8 | length 3.2
  Top Layer w0.2: U10.8@66.9,-27.325 66.9,-26.825 67.05,-26.975 67.175,-26.975 68.8,-25.35 C120.1@68.9,-25.35
NetC120_2: C120.2 L46.2 Q4.3 | length 4.4
  Top Layer w0.127: Q4.3@70.937,-23.45 Q4.3@71.025,-23.537
  Top Layer w0.2: v3(68.967,-22.384) 68.967,-23.382 C120.2@68.9,-23.45 Q4.3@70.937,-23.45
  Bottom Layer w0.2: L46.2@68.95,-21.225 68.967,-21.243 v3(68.967,-22.384)
NetC121_2: C121.2 C122.2 C127.2 C133.2 R39.1 U6.4 | length 15.2
  Bottom Layer w0.381: R39.1@64,-24.05 64,-26.327 C127.2@64.025,-26.352 ; U6.4@64.15,-33.982 64.15,-29.23 C122.2@64.02,-29.1 ; C133.2@66.55,-29.1 C122.2@64.02,-29.1 ; C121.2@66.652,-26.4 66.605,-26.352 C127.2@64.025,-26.352 ; C122.2@64.02,-29.1 C122.2@64,-29.08 64.025,-29.055 C127.2@64.025,-26.352
NetC129_1: C129.1 C130.2 Q11.3 U6.3 | length 12.5
  Bottom Layer w0.381: Q11.3@57.625,-33.525 57.625,-33.75 56.675,-34.7 C129.1@56.675,-38.4 56.675,-39.925 57.825,-41.075 C130.2@59.45,-41.075 59.456,-41.082 U6.3@61.865,-41.082
NetJ1_5: J1.5 K1.3 K1.10 | length 36.2
  Top Layer w1.8: J1.5@7,-31.55 11.095,-31.55 K1.10@17.4,-25.245 K1.3@22.48,-25.245
  Bottom Layer w1.8: J1.5@7,-31.55 11.095,-31.55 K1.10@17.4,-25.245 K1.3@22.48,-25.245
NetJ3_3: J3.3 R3.1 | length 13.4
  Top Layer w0.127: J3.3@81.73,-81.27 83.075,-79.925 83.075,-70.275 82.712,-69.912 82.712,-69.537 82.125,-68.95 R3.1@82.025,-68.95
NetJ3_4: J3.4 R7.1 | length 5.8
  Top Layer w0.127: R7.1@81.725,-72.95 81.73,-72.955 J3.4@81.73,-78.73
NetJ3_5: J3.5 R8.1 | length 13.3
  Top Layer w0.127: J3.5@84.27,-81.27 85.6,-79.94 85.6,-69.825 84.725,-68.95 R8.1@84.625,-68.95
NetJ3_6: J3.6 R9.1 | length 5.8
  Top Layer w0.127: J3.6@84.27,-78.73 84.27,-73.08 R9.1@84.4,-72.95
NetJ3_7: J3.7 R10.1 | length 13.3
  Top Layer w0.127: J3.7@86.81,-81.27 87.005,-81.27 87.987,-80.288 87.987,-69.537 87.4,-68.95 R10.1@87.3,-68.95
NetJ3_8: J3.8 R11.1 | length 5.8
  Top Layer w0.127: J3.8@86.81,-78.73 86.81,-72.965 R11.1@86.825,-72.95
NetJ3_9: J3.9 R12.1 | length 4.6
  Top Layer w0.127: J3.9@89.35,-81.397 93.872,-81.397 R12.1@93.9,-81.425
NetJ5_5: J5.5 K1.5 K1.8 | length 32.8
  Top Layer w1.8: J5.5@7,-17.985 15.22,-17.985 K1.8@17.4,-20.165 K1.5@22.48,-20.165
  Bottom Layer w1.8: J5.5@7,-17.985 15.22,-17.985 K1.8@17.4,-20.165 K1.5@22.48,-20.165
NetJ6_5: J6.5 U4.4 U4.5 | length 17.4
  Top Layer w0.8: 55.675,-45.525 58.625,-42.575 U4.5@58.625,-41.975 U4.4@58.625,-35.975
  Top Layer w1.8: J6.5@55.275,-52 55.275,-45.925 55.675,-45.525
NetJ7_5: J7.5 U4.2 U4.7 | length 17.5
  Top Layer w0.8: U4.2@63.025,-35.975 U4.7@63.025,-41.975 63.025,-42.575 66.675,-46.225 66.675,-47.275
  Top Layer w1.8: J7.5@66.675,-52 66.675,-47.275
NetJ8_5: J8.5 K2.5 K2.8 | length 29.6
  Top Layer w1.8: J8.5@30.175,-52 30.175,-45.295 K2.8@32.32,-43.15 K2.5@32.32,-38.07
  Bottom Layer w1.8: J8.5@30.175,-52 30.175,-45.295 K2.8@32.32,-43.15 K2.5@32.32,-38.07
NetJ9_5: J9.5 U4.3 U4.6 | length 39.6
  Top Layer w0.8: U4.6@60.825,-41.975 U4.3@60.825,-35.975 60.825,-35.375 62.825,-33.375
  Top Layer w1.8: 62.825,-33.375 63,-33.2 69.15,-33.2 71.385,-35.435 J9.5@92,-35.435
NetJ10_5: J10.5 K2.3 K2.10 | length 32.1
  Top Layer w1.8: K2.3@37.4,-38.07 K2.10@37.4,-43.15 42.565,-48.315 J10.5@42.565,-52
  Bottom Layer w1.8: K2.3@37.4,-38.07 K2.10@37.4,-43.15 42.525,-48.275 42.525,-51.96 J10.5@42.565,-52
NetL46_1: L46.1 R39.2 | length 2
  Bottom Layer w0.2: R39.2@64,-21.25 64.025,-21.225 L46.1@65.95,-21.225
NetQ11_1: Q11.1 Q12.3 R48.1 | length 4.1
  Bottom Layer w0.381: Q11.1@56.675,-31.325 56.675,-29.673 R48.1@56.65,-29.648 57.109,-29.188 57.109,-28.466 57.675,-27.9 Q12.3@57.675,-27.7
NetU1_2: U1.2 U3.9 | length 17.9
  Top Layer w0.127: U1.2@27.065,-66.375 27.8,-66.375 28.45,-67.025 v2(28.45,-67.725) ; v2(41.65,-70.275) U3.9@42.935,-70.275
  Bottom Layer w0.127: v2(28.45,-67.725) 28.865,-68.14 39.515,-68.14 v2(41.65,-70.275)
NetU1_9: U1.9 U5.2 | length 17.5
  Top Layer w0.127: U5.2@17.065,-66.375 v2(18.2,-66.375) ; v2(31.55,-70.275) U1.9@32.935,-70.275
  Bottom Layer w0.127: v2(18.2,-66.375) 22.1,-70.275 v2(31.55,-70.275)
NetU2_2: U2.2 U7.9 | length 17.8
  Top Layer w0.127: U2.2@47.065,-66.375 47.975,-66.375 48.525,-66.925 v2(48.525,-67.475) ; v2(61.7,-70.25) 62.91,-70.25 U7.9@62.935,-70.275
  Bottom Layer w0.127: v2(48.525,-67.475) 50.631,-67.475 53.406,-70.25 v2(61.7,-70.25)
NetU2_9: U2.9 U3.2 | length 17.9
  Top Layer w0.127: U3.2@37.065,-66.375 37.925,-66.375 38.434,-66.884 38.434,-67.584 v2(38.5,-67.65) ; v2(51.575,-70.275) U2.9@52.935,-70.275
  Bottom Layer w0.127: v2(38.5,-67.65) 38.515,-67.665 43.804,-67.665 44.104,-67.966 49.265,-67.966 v2(51.575,-70.275)
NetU7_2: U7.2 U11.9 | length 18
  Top Layer w0.127: U7.2@57.065,-66.375 58.05,-66.375 58.475,-66.8 v2(58.475,-67.7) ; v2(71.65,-70.275) U11.9@72.935,-70.275
  Bottom Layer w0.127: v2(58.475,-67.7) 69.075,-67.7 v2(71.65,-70.275)
NetU8_5: U8.5 U10.5 | length 20.4
  Top Layer w0.381: U10.5@64.95,-27.325 64.985,-27.29 64.985,-26.515 67.6,-23.9 67.6,-22.423 68.673,-21.35 73.021,-21.35 73.791,-22.12 80.017,-22.12 80.24,-22.343 80.24,-23.166 U8.5@80.275,-23.2
RX_ATT_OUT: J16.5 U9.2 | length 8.8
  Top Layer w0.127: 64.95,-13.775 64.975,-13.75 ; J16.5@64.975,-7.025 J16.5@65,-7
  Top Layer w0.2: U9.2@64.95,-15.775 64.95,-13.775
  Top Layer w1.5: 64.975,-13.75 J16.5@64.975,-7.025
RX_IN_LNA: D7.3 K3.3 K3.10 R73.2 U8.4 | length 48.3
  Top Layer w0.2: 78.725,-30.15 80.275,-28.6 U8.4@80.275,-27.65
  Top Layer w1.8: K3.3@45.075,-21.825 K3.10@45.075,-26.905 48.32,-30.15 78.725,-30.15
  Bottom Layer w1.8: K3.10@45.075,-26.905 K3.3@45.075,-21.825
RX_LNA_ATT: U9.14 U10.4 | length 3.3
  Top Layer w0.2: U10.4@64.95,-22.875 U9.14@64.95,-19.575
SWR_DET_BACKW: J4.8 U12.3 | length 43.5
  Top Layer w0.2: U12.3@82.05,-55.025 82.075,-55 v3(83.525,-55)
  Bottom Layer w0.2: v3(83.525,-55) 91.525,-63 91.525,-87.015 J4.8@86.81,-91.73
SWR_DET_FORW: J4.7 U12.6 | length 43.8
  Top Layer w0.2: U12.6@88.05,-55.025 88.07,-55.005 v3(89.403,-55.005)
  Bottom Layer w0.2: J4.7@86.81,-94.27 88.1,-92.98 88.1,-90.975 91.925,-87.15 91.925,-57.527 v3(89.403,-55.005)
TUN_I_1: J12.3 U5.12 | length 20.1
  Top Layer w0.15: J12.3@13.73,-81.27 14.95,-80.05 14.95,-77.475 20.575,-71.85 23.825,-71.85 24.225,-71.45 24.225,-68.9 23.812,-68.487 23.097,-68.487 U5.12@22.935,-68.325
TUN_I_2: J12.4 U5.11 | length 17.3
  Top Layer w0.15: J12.4@13.73,-78.73 13.7,-78.7 13.7,-77.525 19.652,-71.573 23.677,-71.573 23.925,-71.325 23.925,-69.1 23.8,-68.975 U5.11@22.935,-68.975
TUN_I_3: J12.5 U1.3 | length 20.3
  Top Layer w0.15: J12.5@16.27,-81.27 16.27,-81.155 17.5,-79.925 17.5,-77.525 22.5,-72.525 23.972,-72.525 24.85,-71.647 24.85,-68 25.825,-67.025 U1.3@27.065,-67.025
TUN_I_4: J12.6 U5.13 | length 16.9
  Top Layer w0.15: J12.6@16.27,-78.73 16.25,-78.71 16.25,-77.5 21.525,-72.225 23.866,-72.225 24.525,-71.566 24.525,-68.55 23.812,-67.837 23.097,-67.837 U5.13@22.935,-67.675
TUN_I_5: J12.7 U1.5 | length 17.1
  Top Layer w0.15: J12.7@18.81,-81.27 18.855,-81.27 20.05,-80.075 20.05,-77.333 25.525,-71.858 25.525,-68.712 25.75,-68.487 26.903,-68.487 U1.5@27.065,-68.325
TUN_I_6: J12.8 U1.4 | length 15.3
  Top Layer w0.15: J12.8@18.81,-78.73 18.81,-78.11 25.175,-71.745 25.175,-68.208 25.708,-67.675 U1.4@27.065,-67.675
TUN_I_7: J12.9 U1.11 | length 21.6
  Top Layer w0.15: J12.9@21.35,-81.397 23.675,-79.072 23.675,-75.575 27.625,-71.625 32.875,-71.625 33.975,-70.525 33.975,-69.275 33.675,-68.975 U1.11@32.935,-68.975
TUN_T: J12.10 U1.6 | length 12.7
  Top Layer w0.15: J12.10@21.35,-78.73 21.35,-76.533 25.852,-72.031 25.852,-69.164 26.041,-68.975 U1.6@27.065,-68.975
TUN_С_1: J13.3 U5.5 | length 34.7
  Top Layer w0.23: J13.3@13.73,-94.27 14.055,-94.27 14.947,-93.378 14.947,-89.772 12.45,-87.275 11.25,-87.275 8.35,-84.375 8.35,-75.375 15.4,-68.325 U5.5@17.065,-68.325
TUN_С_2: J13.4 U5.4 | length 31.6
  Top Layer w0.23: J13.4@13.73,-91.73 13.73,-90.564 7.775,-84.609 7.775,-74.95 15.05,-67.675 U5.4@17.065,-67.675
TUN_С_3: J13.5 U1.12 | length 37.4
  Top Layer w0.15: J13.5@16.27,-94.27 16.355,-94.27 17.55,-93.075 17.55,-89.775 24.2,-83.125 24.2,-75.925 28.1,-72.025 33,-72.025 34.302,-70.723 34.302,-68.777 34.012,-68.487 33.097,-68.487 U1.12@32.935,-68.325
TUN_С_4: J13.6 U5.6 | length 31.6
  Top Layer w0.23: J13.6@16.27,-91.73 16.27,-88.77 14.175,-86.675 11.5,-86.675 8.975,-84.15 8.975,-75.575 15.413,-69.137 16.903,-69.137 U5.6@17.065,-68.975
TUN_С_5: J13.7 U1.14 | length 38.1
  Top Layer w0.15: J13.7@18.81,-94.27 20.025,-93.055 20.025,-89.925 25.075,-84.875 25.075,-76.25 28.55,-72.775 33.262,-72.775 34.921,-71.116 34.921,-68.071 33.9,-67.05 32.96,-67.05 U1.14@32.935,-67.025
TUN_С_6: J13.8 U1.13 | length 34.6
  Top Layer w0.15: J13.8@18.81,-91.73 18.81,-89.14 24.675,-83.275 24.675,-76.075 28.35,-72.4 33.175,-72.4 34.629,-70.946 34.629,-68.554 33.912,-67.837 33.097,-67.837 U1.13@32.935,-67.675
TUN_С_7: J13.9 U3.3 | length 37.4
  Top Layer w0.15: J13.9@21.35,-94.397 25.5,-90.247 25.5,-76.475 28.675,-73.3 33.148,-73.3 35.198,-71.25 35.198,-67.402 35.575,-67.025 U3.3@37.065,-67.025
TUNE_OUT: R7.2 U11.5 | length 21.8
  Top Layer w0.127: U11.5@67.065,-68.325 65.825,-68.325 64.825,-69.325 64.825,-71.175 65.25,-71.6 81.175,-71.6 R7.2@81.725,-71.05
TUNER: J17.5 K3.4 K3.9 | length 39.9
  Top Layer w1.8: J17.5@42.3,-7 42.3,-7.189 42.513,-7.402 42.513,-21.803 K3.4@42.535,-21.825 K3.9@42.535,-26.905
  Bottom Layer w1.8: J17.5@42.5,-7 42.5,-21.79 K3.4@42.535,-21.825 K3.9@42.535,-26.905
TX_AMP_OUT: K2.4 K2.9 K3.5 K3.8 | length 46.9
  Top Layer w1.8: K2.9@34.86,-43.15 K2.4@34.86,-38.07 34.86,-32.04 K3.8@39.995,-26.905 K3.5@39.995,-21.825
  Bottom Layer w1.8: K2.9@34.86,-43.15 K2.4@34.86,-38.07 34.86,-36.889 34.825,-36.854 34.825,-32.075 K3.8@39.995,-26.905 K3.5@39.995,-21.825
TX_PTT_OUT: C110.1 D8.2 J11.6 J13.10 K3.12 R10.2 U2.14 | length 170.2
  Top Layer w0.127: 54.672,-64.872 57.332,-62.213 68.888,-62.213 v3(68.975,-62.3) ; v3(71.949,-64.858) 72.182,-64.625 85.875,-64.625 87.3,-66.05 R10.2@87.3,-67.05
  Top Layer w0.23: v2(50.15,-60.35) 54.672,-64.872 54.672,-66.528 54.175,-67.025 ; K3.12@50.155,-26.905 53.777,-26.905 D8.2@54.4,-26.282 56.318,-26.282 57.15,-25.45 C110.1@57.25,-25.45 ; U2.14@52.935,-67.025 54.175,-67.025 ; v3(54.475,-67.45) 54.475,-67.35 54.175,-67.05 54.175,-67.025
  Bottom Layer w0.127: v3(68.975,-62.3) 71.533,-64.858 v3(71.949,-64.858)
  Bottom Layer w0.2: J13.10@21.35,-91.73 25.925,-96.305 50.47,-96.305 53.775,-93 60.85,-93 61.08,-92.77 61.08,-91.92 J11.6@61.27,-91.73 69.5,-83.5 69.5,-77.75 63.7,-71.95 63.7,-70.6 61.85,-68.75 55.775,-68.75 v3(54.475,-67.45)
  Bottom Layer w0.23: v2(50.15,-60.35) 49.8,-60 49.8,-27.604 50.155,-27.249 K3.12@50.155,-26.905
VHF_AMP_BIAS_ON: J11.4 U2.6 | length 29.3
  Top Layer w0.127: U2.6@47.065,-68.975 46,-68.975 45.858,-69.117 45.858,-78.933 58.655,-91.73 J11.4@58.73,-91.73
VHF_SWR_DET_BACKW: J11.9 U12.4 | length 46.5
  Top Layer w0.127: J11.9@66.35,-94.397 76.716,-84.031 76.716,-77.372 76.359,-77.016 75.991,-77.016 v3(75.9,-76.925)
  Top Layer w0.2: v3(80.325,-57.25) 82.025,-57.25 U12.4@82.05,-57.225
  Bottom Layer w0.2: v3(75.9,-76.925) 75.977,-76.848 75.977,-76.587 76.044,-76.52 76.044,-74.404 75.875,-74.235 75.875,-60.4 79.025,-57.25 v3(80.325,-57.25)
VHF_SWR_DET_FORW: J11.7 U12.5 | length 52.7
  Top Layer w0.127: J11.7@63.81,-94.27 65.055,-93.025 66.886,-93.025 76.225,-83.686 v3(76.225,-77.575)
  Top Layer w0.2: v3(85.55,-58.1) 87.175,-58.1 U12.5@88.05,-57.225
  Bottom Layer w0.2: v3(76.225,-77.575) 76.225,-77.467 76.427,-77.265 76.427,-74.325 76.202,-74.1 76.202,-61.598 78.55,-59.25 84.4,-59.25 v3(85.55,-58.1)
pads on no net: U5.9

## Polygon pours and split planes (outlines as drawn)
GND on Top Layer "GND_L01_P001" (solid, pour order 1): 0,0 99.9,0 99.9,-99.9 0.05,-99.9
GND on Bottom Layer "GND_L02_P000" (solid, pour order 0): 0,0 99.9,0 99.9,-99.9 0.05,-99.9

## Keep-outs
Keep-Out Layer, Board:
  lines w0.2: 0,-100 100,-100 100,0 0,0 0,-100

## Silkscreen, mask and mechanical layers (free items; w line width, h text height)
Top Overlay:
  text "RF-UNIT-SPLIT-rev3" at 13.754,-61.146 h1.52